# Altium PCB V3.3云台.PcbDoc (part 2 of 2)
Units mm, origin at the board's own origin, x right, y up, seen from the top; angles counter-clockwise.
Board outline 55 x 73 mm, 2 copper layers (Top Layer, Bottom Layer), stack 1.569 mm thick; 99 components, 126 nets, 372 pads, 178 vias.
Unrouted connection lines stored in the file: 226.
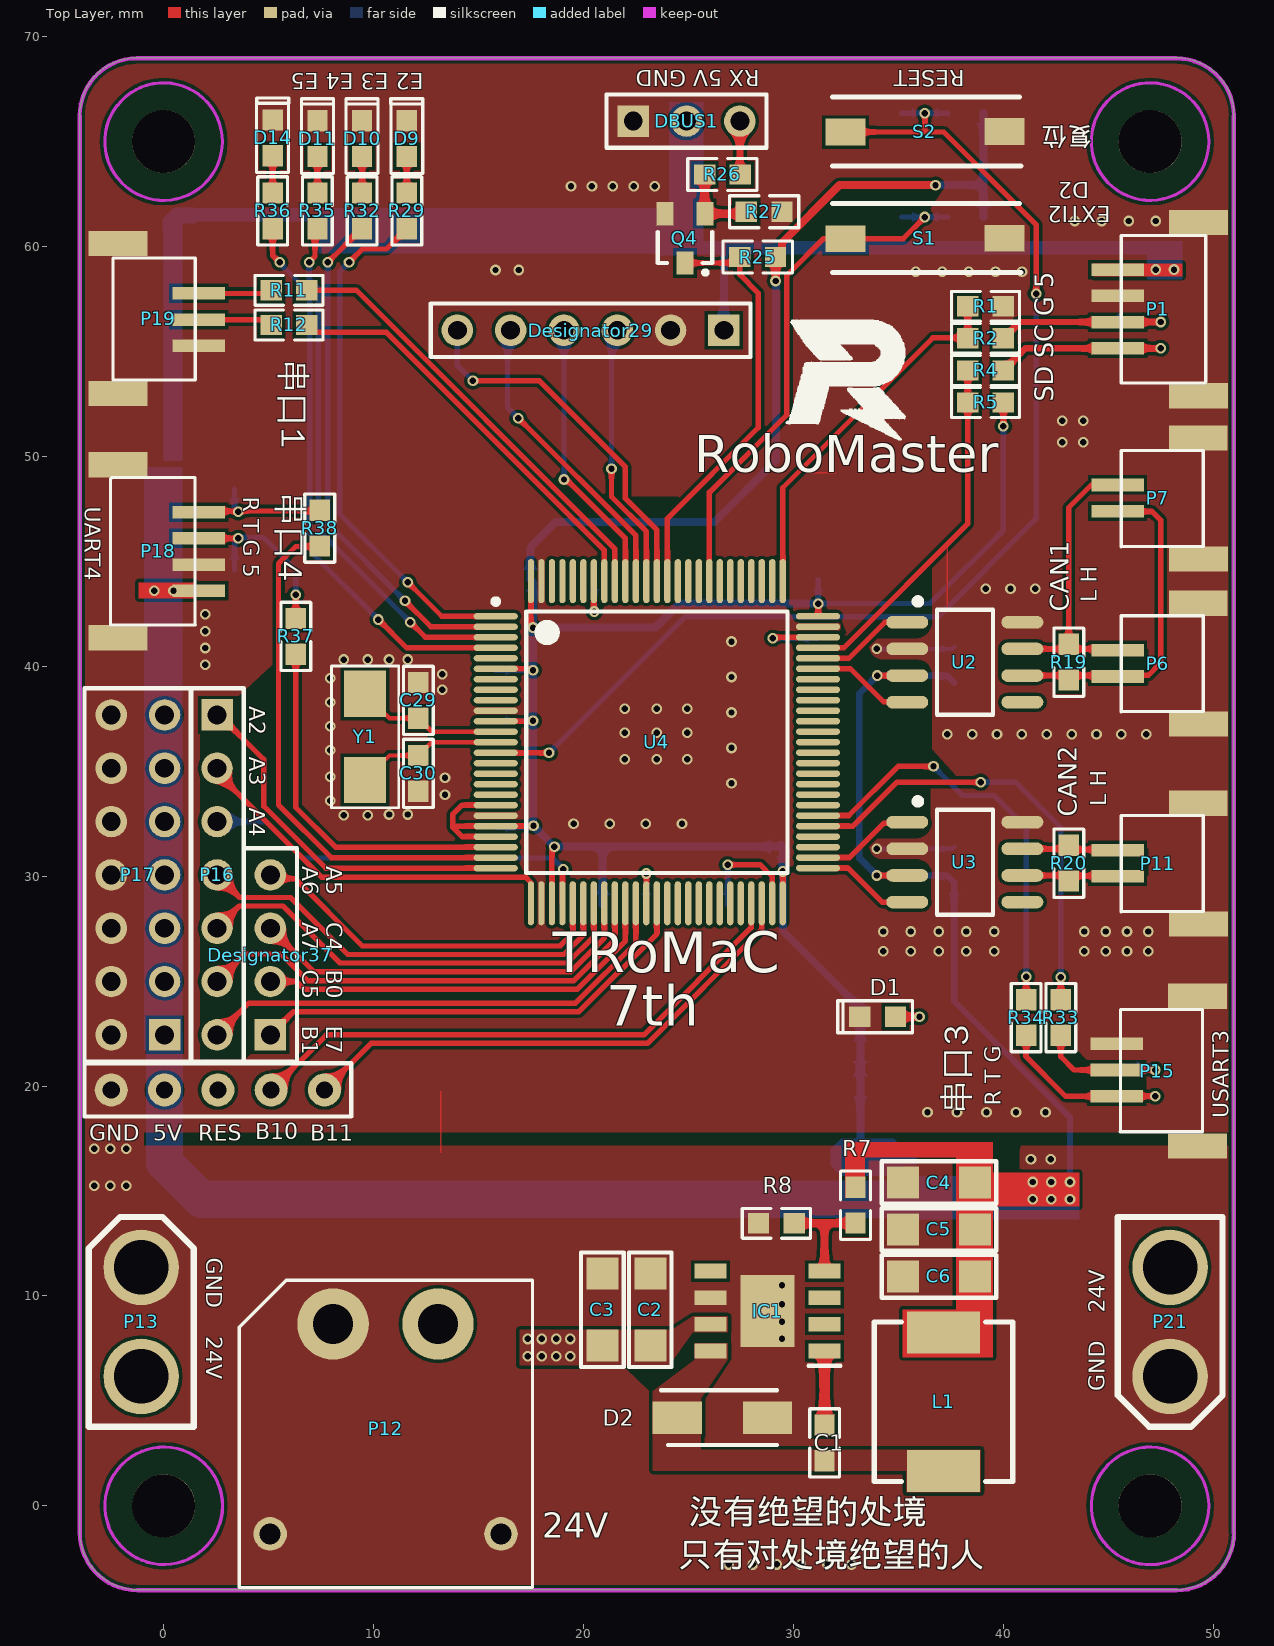
[diagram p0: Top Layer view]

## Silkscreen, mask and mechanical layers (free items; w line width, h text height) (continued)
Top Overlay: (continued)
  text "C5" at 6.604,25.527 h0.76 r270
  text "B0" at 7.747,25.527 h0.76 r270
  text "TRoMaC" at 18.542,24.765 h3.3
  text "B1" at 6.604,22.86 h0.76 r270
  text "E7" at 7.747,22.86 h0.76 r270
  text "7th" at 21.082,22.225 h3.3
  text "R T G" at 39.878,19.05 h0.76 r90
  text "串口3" at 38.735,18.669 h2.03 r90
  text "USART3" at 50.741,18.474 h0.76 r90
  text "GND" at -3.556,17.399 h0.76
  text "5V" at -0.508,17.399 h0.76
  text "RES" at 1.651,17.399 h0.76
  text "B11" at 6.985,17.399 h0.76
  text "GND    24V" at 2.032,11.811 h0.76 r270
  text "GND    24V" at 44.831,5.461 h0.76 r90
  text "没有绝望的处境" at 25.019,-1.27 h2.03
  text "24V" at 18.034,-1.924 h2.03
  text "只有对处境绝望的人" at 24.511,-3.302 h2.03
Bottom Overlay:
  text "Amender : JZH" at 29.083,18.288 h2.54
  text "2022-5-11" at 28.956,15.748 h3.05
Mechanical 1:
  lines w0.2: -4.005,66.251 cw(c-1.261,66.251) -1.266,68.995 ; -4,-1.262 ccw(c-1.257,-1.257) -1.257,-4 ; 48.246,68.99 cw(c48.246,66.246) 50.99,66.251 ; 48.256,-4.005 ccw(c48.251,-1.262) 50.995,-1.262
  lines w0.203: -4,-1.257 -4,66.256 ; -1.266,68.99 48.246,68.99 ; -1.257,-4 48.261,-4 ; 50.99,-1.271 50.99,66.251
  lines w0.254: 56.134,-16.383 96.134,-16.383 96.134,83.617 56.134,83.617 56.134,-16.383
Mechanical 15:
  lines w0.203: -1.276,-4.01 48.246,68.99 48.256,-4.005 -1.266,68.995 -1.257,-4